# Altium PCB PCB1.PcbDoc
Units mm, origin at the board's own origin, x right, y up, seen from the top; angles counter-clockwise.
Board outline 59.97 x 69.92 mm, 2 copper layers (Top Layer, Bottom Layer); 51 components, 40 nets, 194 pads, 27 vias.
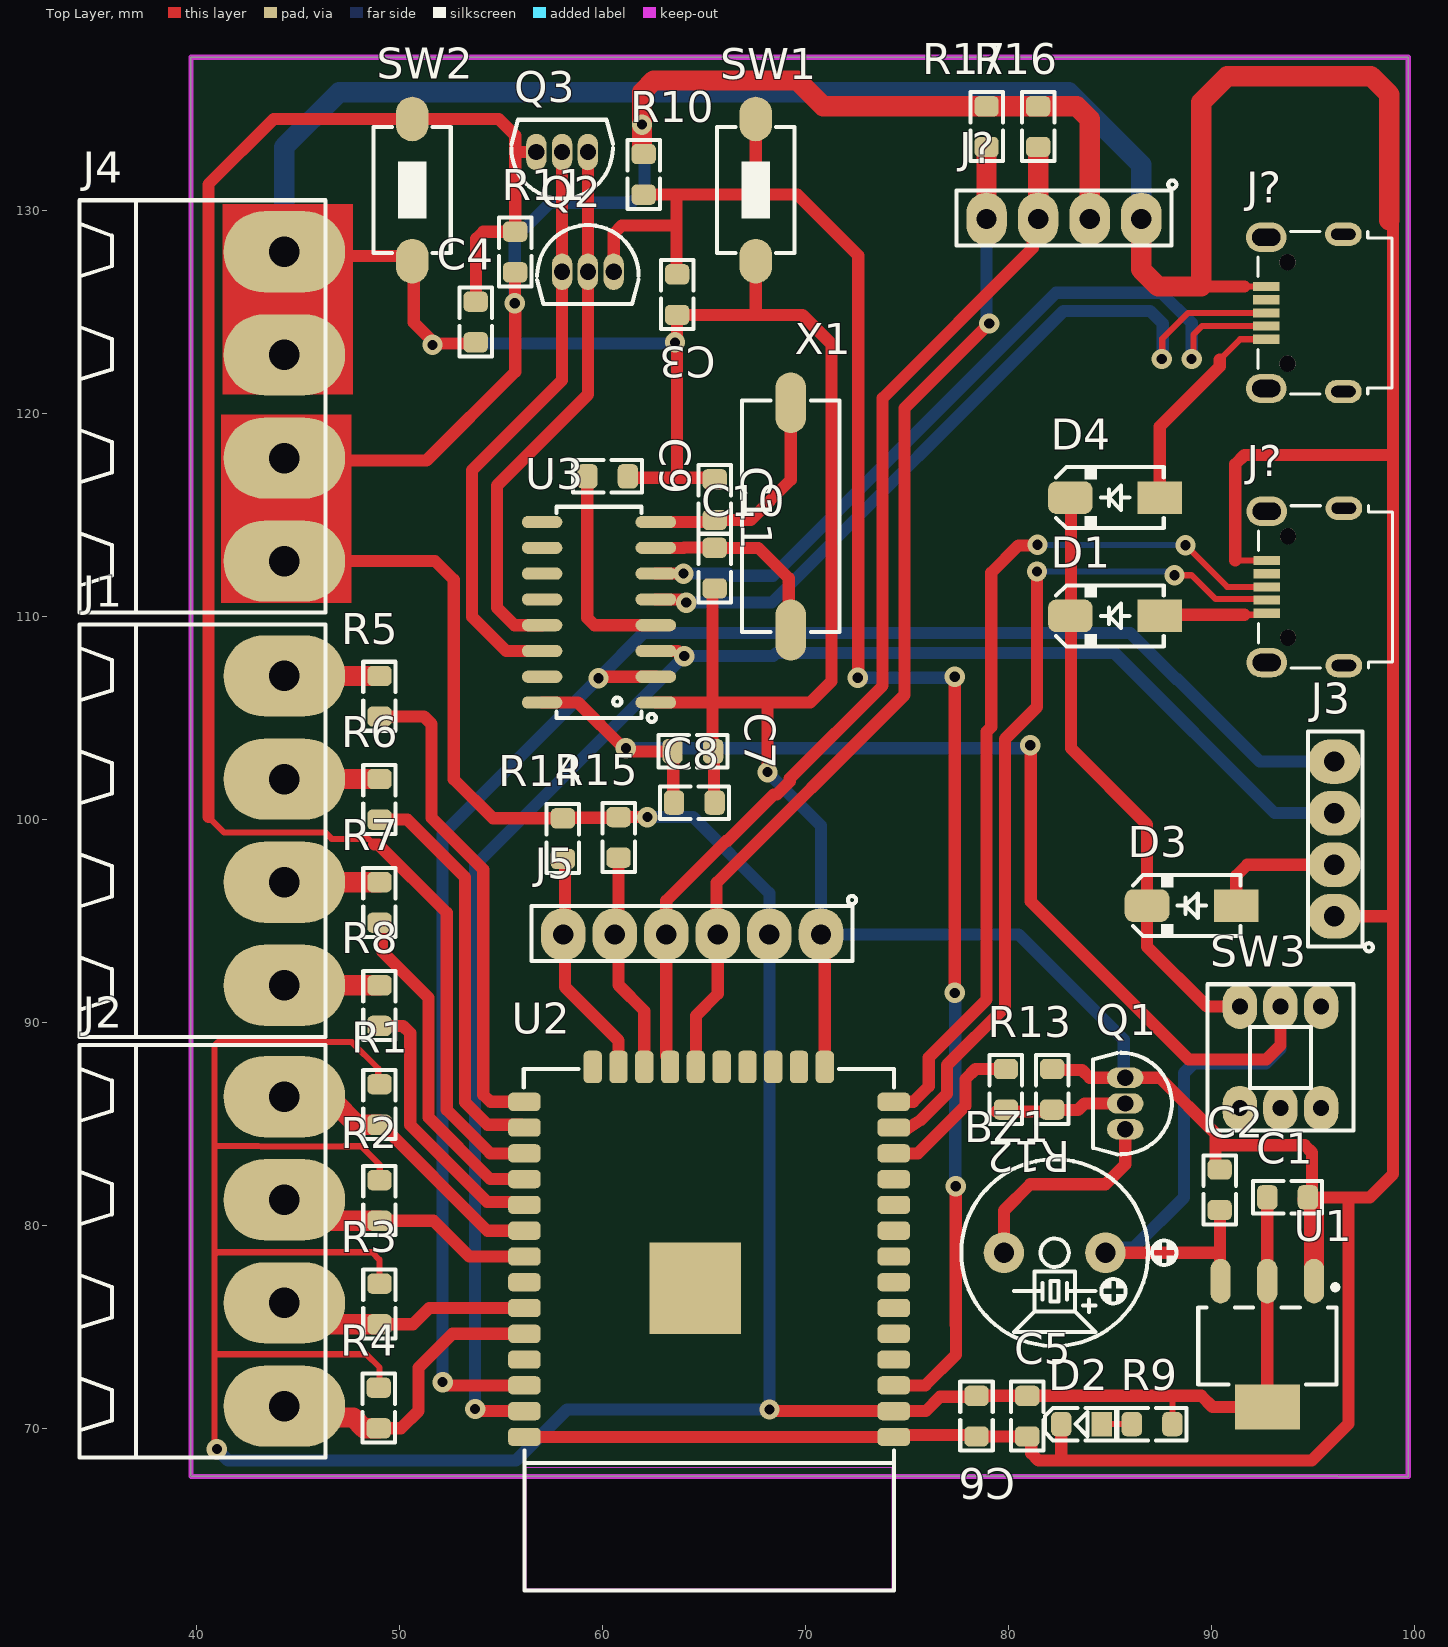
[diagram p0: Top Layer view]
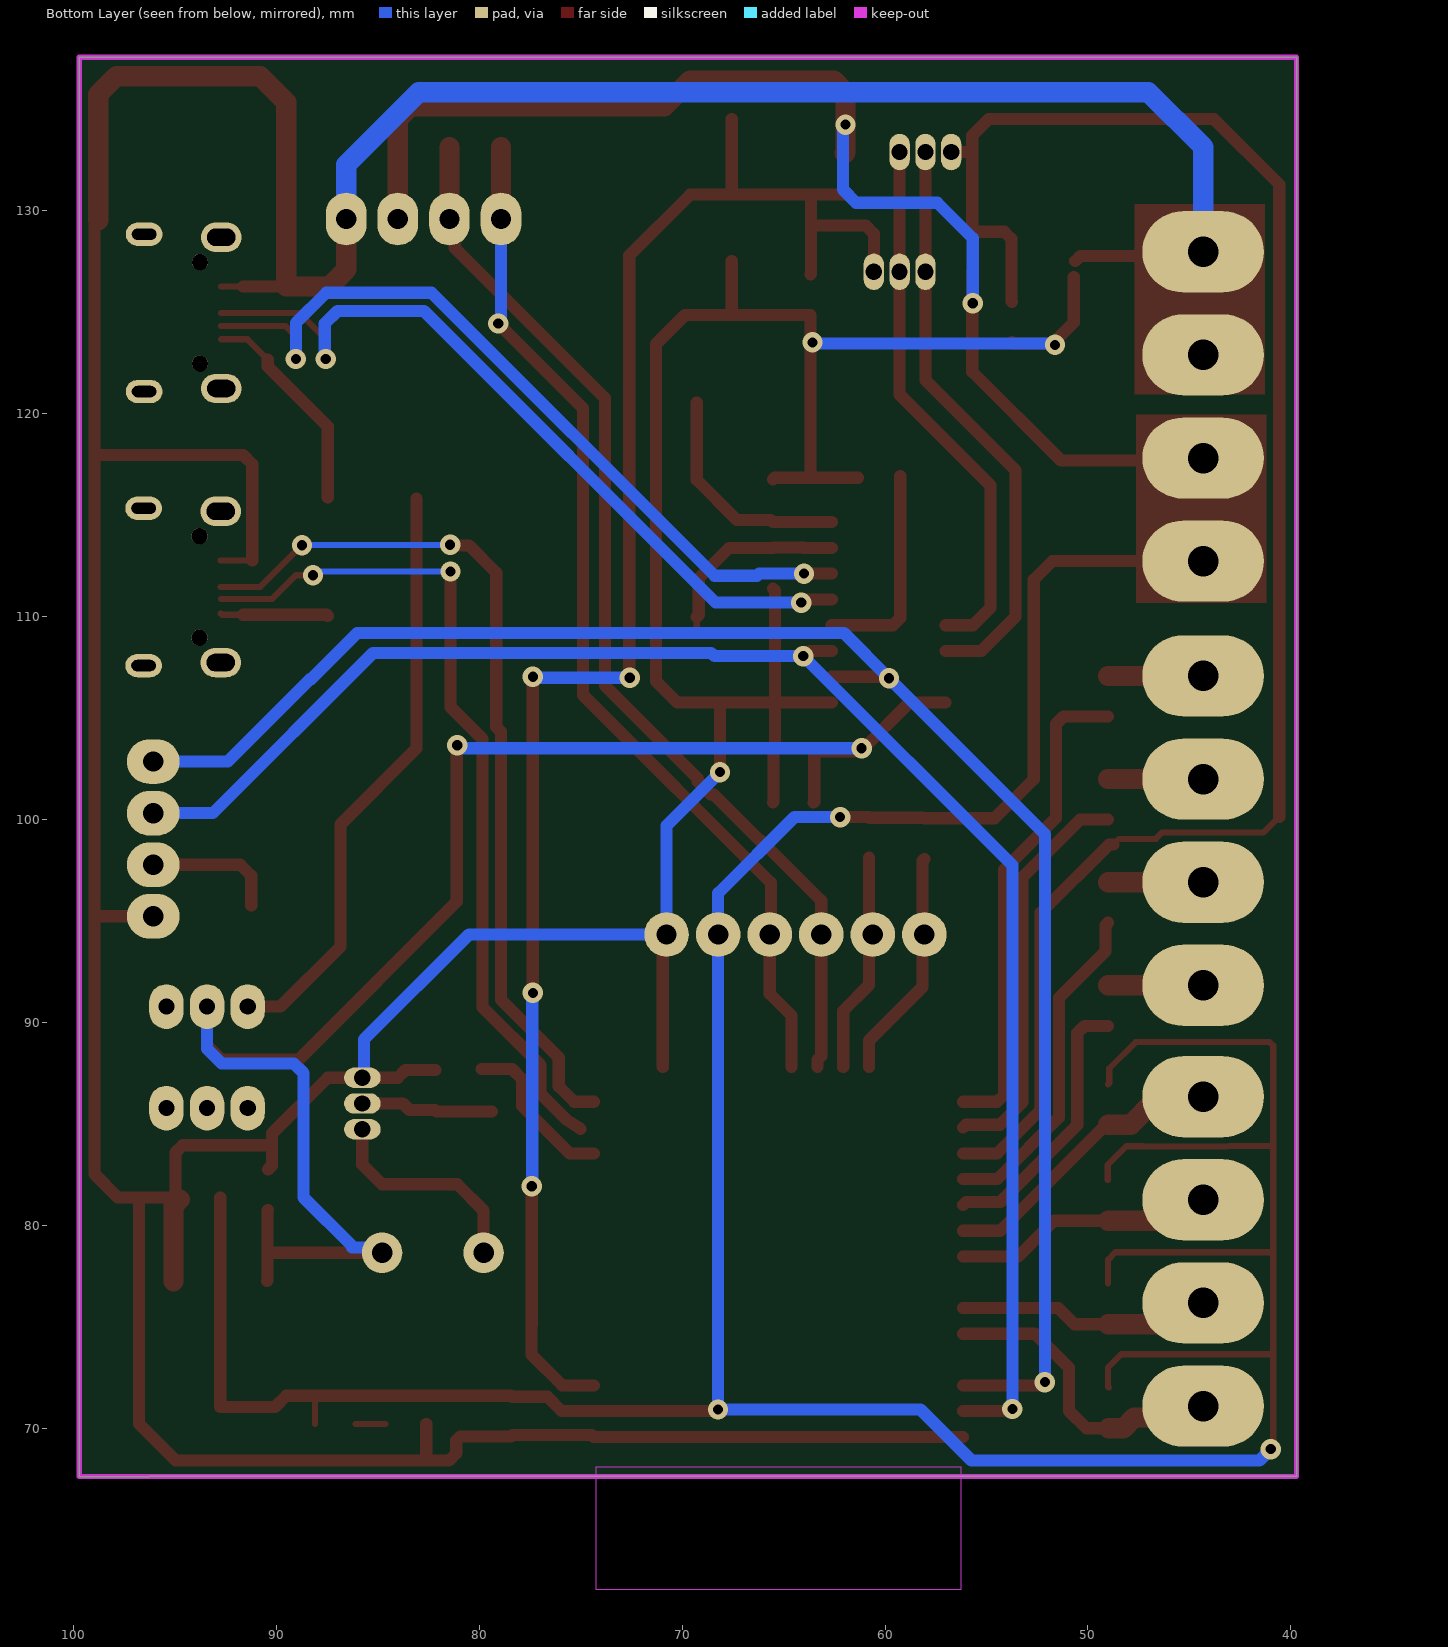
[diagram p1: Bottom Layer view, seen from below]

## Layer stack, top to bottom
Top Solder: solder mask 0.0102, Solder Resist, Dk 3.5
Top Layer: signal copper 0.0356
Dielectric 1: dielectric 0.32, FR-4, Dk 4.8
Bottom Layer: signal copper 0.0356
Bottom Solder: solder mask 0.0102, Solder Resist, Dk 3.5

## Board outline
39.725,67.634 96.244,67.625 96.245,67.625 99.692,67.625 99.692,137.541 39.725,137.541

## Design rules (kind name [scope] priority, off if disabled: settings)
Clearance [All] p1: gap=0.3 ignorepadtopadclearanceinfootprint=FALSE except(0.2: Arc-SMDPad Arc-THPad Track-SMDPad Track-THPad SMDPad-SMDPad SMDPad-THPad THPad-THPad)
PolygonConnect [All] p1: connectstyle=Relief reliefconductorwidth=0.254 reliefentries=4 polygonreliefangle="90 Angle" airgapwidth=0.254
RoutingVias [All] p1: holewidth=0.5 width=1 viastyle="Through Hole" minholewidth=0.5 minwidth=1 maxholewidth=0.6 maxwidth=1.2
SolderMaskExpansion [All] p1: expansion=0.102 istentingtop=FALSE
SupplyNets "Schematic Supply Nets_3" [InNet('+5')] p1: voltage=0.000
SupplyNets "Schematic Supply Nets_2" [InNet('VCC')] p2: voltage=0.000
SupplyNets "Schematic Supply Nets_1" [InNet('GND')] p3: voltage=0.000
SupplyNets "Schematic Supply Nets" [InNet('+3.3')] p4: voltage=0.000
Width [All] p1: maxlimit=1 minlimit=0.3 preferedwidth=0.6
30 further rules are at their usual default settings.

## Components (designator, comment, footprint, x,y, rotation, side; value= is the part's Value field where it differs from the comment)
BZ1 "BUZZER" BZ_C9 82.275,78.65 r180 top
C1 "20uF" C0805 93.75,81.375 r0 top
C2 "10uF" C0805 90.4,81.75 r90 top
C3 "100nF" C0805 63.675,125.85 r90 top
C4 "100nF" C0805 53.75,124.5 r90 top
C5 "10uF" C0805 80.925,70.6 r90 top
C6 "100nF" C0805 78.425,70.6 r270 top
C7 "10uF" C0805 64.45,103.35 r0 top
C8 "100nF" C0805 64.525,100.825 r0 top
C9 "100nF" C0805 60.25,116.9 r0 top
C10 "22pF" C0805 65.525,112.375 r270 top
C11 "22pF" C0805 65.525,115.75 r90 top
D1 "1N5822" D_SMA 85.25,110.025 r180 top
D2 "LED0805" LED0805 83.6,70.208 r180 top
D3 "1N5822" D_SMA 89.025,95.75 r180 top
D4 "1N5822" D_SMA 85.25,115.85 r180 top
J1 "CONN_TB4" MSTB_4#1 44.325,99.445 r90 top
J2 "CONN_TB4" MSTB_4#2 44.325,78.715 r90 top
J3 "HDRF4" HDR_F_1X4#1 96.05,99.035 r90 top
J4 "CONN_TB4" MSTB_4#1 44.325,120.34 r90 top
J5 "HDRF6" HDR_F_1X6 64.41,94.325 r180 top
J? "629105150521" 629105150521 95.625,111.45 r90 top
J? "629105150521" 629105150521 95.6,124.95 r90 top
J? "HDRF4" HDR_F_1X4#2 82.73,129.575 r180 top
Q1 "C945" TO92_3 85.75,86 r270 top
Q2 "C945" TO92_3 59.28,126.975 r0 top
Q3 "BC557" TO92_3 58.01,132.875 r180 top
R1 "1K" R0805 49.012,85.95 r90 top
R2 "1K" R0805 49.012,81.225 r90 top
R3 "1K" R0805 49.012,76.125 r90 top
R4 "1K" R0805 48.975,71 r90 top
R5 "1K" R0805 49.012,106.065 r270 top
R6 "1K" R0805 49.012,100.985 r270 top
R7 "1K" R0805 49.012,95.905 r270 top
R8 "1K" R0805 49.012,90.825 r270 top
R9 "1K" R0805 87.075,70.208 r0 top
R10 "1K" R0805 62.025,131.775 r90 top
R11 "1K" R0805 55.7,127.95 r270 top
R12 "1K" R0805 79.875,86.7 r90 top
R13 "1K" R0805 82.15,86.7 r270 top
R14 "1K" R0805 58.05,99.05 r90 top
R15 "1K" R0805 60.79,99.11 r90 top
R16 "1K" R0805 81.46,134.125 r90 top
R17 "1K" R0805 78.92,134.125 r90 top
SW1 "PUSHBUTTON" SWPBS_SPST_6X3X5 67.55,131 r90 top
SW2 "PUSHBUTTON" SWPBS_SPST_6X3X5 50.625,131 r90 top
SW3 "swPUSH" SWPUST_DPDT_S_7X7 93.4,88.275 r270 top
U1 "LD1117" SOT223_4 92.75,74.05 r270 top
U2 "ESP-32S" ESP32S 65.25,78.7 r180 top
U3 "CH340G" SO_16 59.825,110.2 r180 top
X1 "XTL_12MHz" XTL_2_11X5 69.275,114.925 r90 top

## Footprints (in the part's own frame and the unit in brackets; to place one, negate y for a bottom-side part, rotate by r counter-clockwise, add the part's x,y. Pads: shape width x height; smd on the part's side, far side on the other; paste and mask are expansions set on the pad)
629105150521 [mm] "Micro USB 2.0 SMT Type B Horizontal 5 Contacts High Current"
  rect 0.45x1.3 smd: 1(-1.3,2.9) 2(-0.65,2.9) 3(0,2.9) 4(0.65,2.9) 5(1.3,2.9)
  round 0.8 hole 0.8 unplated: MH1(-2.5,1.85) MH2(2.5,1.85)
  oval 1.15x1.8 hole 0.55 slot 1.2 at 90 deg: Shell(-3.875,-0.9) Shell(3.875,-0.9)
  oval 1.45x2 hole 0.85 slot 1.4 at 90 deg: Shell(-3.725,2.9) Shell(3.725,2.9)
  silkscreen extent -4,-3.3 4,3.3, body extent -4,-3.3 4,3.3, height 2.75
BZ_C9 [mm] "BUZZER 9mm DIA, 7.62mm pitch"
  round 2 hole 1: 1(-2.5,0) 2(2.5,0)
  silkscreen extent -6,-4.6 4.6,4.6, body extent -4.55,-4.55 4.55,4.55, height 5.6
C0805 [mm] "CHIP Capacitor, 2.0X1.3mm, 0805"
  rrect50% 1x1.2 smd paste-0.1 mask+0.075: 1(-1,0) 2(1,0)
  Top Layer pour cut-out: -0.5,0.8 0.5,0.8 0.5,-0.8 -0.5,-0.8
  silkscreen extent -1.7,-0.8 1.7,0.8, body extent -1,-0.62 1,0.63, height 1
D_SMA [mm] "SMA Molded Diode, 2-Leads, Body 4.3x2.7mm, SOD-128"
  rect 2.2x1.6 smd paste-0.1: 1(-2.2,0)
  rrect50% 2.2x1.6 smd paste-0.1: 2(2.2,0)
  silkscreen extent -2.4,-1.5 2.9,1.5, body extent -2.75,-1.4 2.75,1.4, height 2.6
ESP32S [mm] "ESP-32S, ESP32­WROOM­32E"
  rrect50% 1.6x0.9 smd mask+0.075: 1(-9.1,9.125) 2(-9.1,7.855) 3(-9.1,6.585) 4(-9.1,5.315) 5(-9.1,4.045) 6(-9.1,2.775) 7(-9.1,1.505) 8(-9.1,0.235) 9(-9.1,-1.035) 10(-9.1,-2.305) 11(-9.1,-3.575) 12(-9.1,-4.845) 13(-9.1,-6.115) 14(-9.1,-7.385) 25(9.1,-7.385) 26(9.1,-6.115) 27(9.1,-4.845) 28(9.1,-3.575) 29(9.1,-2.305) 30(9.1,-1.035) 31(9.1,0.235) 32(9.1,1.505) 33(9.1,2.775) 34(9.1,4.045) 35(9.1,5.315) 36(9.1,6.585) 37(9.1,7.855) 38(9.1,9.125)
  rrect50% 0.9x1.6 smd mask+0.075: 15(-5.7,-9.1) 16(-4.43,-9.1) 17(-3.16,-9.1) 18(-1.89,-9.1) 19(-0.62,-9.1) 20(0.65,-9.1) 21(1.92,-9.1) 22(3.19,-9.1) 23(4.46,-9.1) 24(5.73,-9.1)
  rect 4.5x4.5 smd: GND(0.68,1.795)
  Top Layer pour cut-out: -9.1,16.7 9.1,16.7 9.1,10.4 -9.1,10.4
  Keep-Out Layer region: 9,10.625 -9,10.625 -9,16.625 9,16.625
  Keep-Out Layer region: 9,10.625 -9,10.625 -9,16.625 9,16.625
  silkscreen extent -9.1,-9 9.13,16.7, body extent -9.04,-8.93 9.04,16.61, height 3
HDR_F_1X4#1 [mm] "HEADER FEMALE pitch: 2.54mm"
  oval 2.2x2.6 hole 1 mask+0.1: 1(-3.81,0) 2(-1.27,0) 3(1.27,0) 4(3.81,0)
  silkscreen extent -5.54,-1.9 5.3,1.3, body extent -5.2,-1.3 5.21,1.2, height 8.5
HDR_F_1X4#2 [mm] "HEADER FEMALE pitch: 2.54mm"
  oval 2x2.6 hole 1 mask+0.1: 1(-3.81,0) 2(-1.27,0) 3(1.27,0) 4(3.81,0)
  silkscreen extent -5.54,-1.9 5.3,1.3, body extent -5.2,-1.3 5.21,1.2, height 8.5
HDR_F_1X6 [mm] "HEADER FEMALE pitch: 2.54mm"
  oval 2.2x2.6 / inner oval 2.2x2.6 / far side round 2.2 hole 1 mask+0.1: 1(-6.35,0) 2(-3.81,0) 3(-1.27,0) 4(1.27,0) 5(3.81,0) 6(6.35,0)
  silkscreen extent -8.08,-1.9 7.9,1.3, body extent -7.74,-1.3 7.75,1.2, height 8.5
LED0805 [mm] "LED SMD 0805"
  rect 1x1.2 smd paste-2 mask+0.075: 1(-1,0)
  rrect50% 1x1.2 smd paste-2 mask+0.075: 2(1,0)
  Top Layer pour cut-out: -0.5,0.8 0.5,0.8 0.5,-0.8 -0.5,-0.8
  silkscreen extent -1.7,-0.8 1.8,0.8, body extent -1.01,-0.62 1.01,0.63, height 1.1
MSTB_4#1 [mm] "PHOENIX MSTB 2, 5-G, 5.08mm pitch"
  oval 4x6 hole 1.5: 1(-7.62,0) 2(-2.54,0) 3(2.54,0) 4(7.62,0)
  silkscreen extent -10.16,-2.03 10.16,10.1, body extent -10,-2 10,10, height 8.6
MSTB_4#2 [mm] "PHOENIX MSTB 2, 5-G, 5.08mm pitch"
  oval 4x6 hole 1.5: 1(-7.62,0) 2(-2.54,0) 3(2.54,0) 4(7.62,0)
  silkscreen extent -10.16,-2.03 10.16,10.1, body extent -10,-2 10,10, height 8.6
R0805 [mm] "CHIP RESISTOR 1/8 WATT ,2.0X1.3mm, 0805, 2012"
  rrect50% 1x1.2 smd paste-0.1 mask+0.075: 1(-1,0) 2(1,0)
  Top Layer pour cut-out: -0.5,0.8 0.5,0.8 0.5,-0.8 -0.5,-0.8
  silkscreen extent -1.7,-0.8 1.7,0.8, body extent -1.15,-0.67 1.15,0.67, height 0.76
SO_16 [mm] "SOP, SOIC, 3.9mm width, 1.27mm pitch,"
  oval 2x0.6 smd: 1(-2.8,4.445) 2(-2.8,3.175) 3(-2.8,1.905) 4(-2.8,0.635) 5(-2.8,-0.635) 6(-2.8,-1.905) 7(-2.8,-3.175) 8(-2.8,-4.445) 9(2.8,-4.445) 10(2.8,-3.175) 11(2.8,-1.905) 12(2.8,-0.635) 13(2.8,0.635) 14(2.8,1.905) 15(2.8,3.175) 16(2.8,4.445)
  silkscreen extent -2.8,-5.2 2.1,5.4, body extent -3.1,-4.95 3.1,4.95, height 1.7
SOT223_4 [mm] "SOT223, 4-Leads, Body 6.5x3.5mm, Pitch 2.30mm"
  oval 2.2x1 smd: 1(-3.2,2.3) 2(-3.2,0) 3(-3.2,-2.3)
  rect 2.2x3.2 smd paste-5: 4(3,0)
  Top Layer pour cut-out: -1.7,3.556 1.7,3.556 1.7,-3.556 -1.7,-3.556
  silkscreen extent -3.02,-3.4 1.9,3.48, body extent -3.5,-3.25 3.5,3.25, height 1.7
SWPBS_SPST_6X3X5 [mm] "SWITCH, PUSHBUTTON, SMD, SPST, 6X3.5mm, SKQMBBE010, 50000 Cycles, 1.57N Force"
  oval 2.2x1.6 smd mask+0.1: 1(-3.5,0) 2(3.5,0)
  silkscreen extent -3.1,-1.9 3.1,1.9, body extent -3.65,-1.75 3.65,1.75, height 5
SWPUST_DPDT_S_7X7 [mm] "KFC 7x7, 2mm pitch"
  oval 2.2x1.7 hole 0.8: 1(-2.5,2) 2(-2.5,0) 3(-2.5,-2) 4(2.5,-2) 5(2.5,0) 6(2.5,2)
  silkscreen extent -3.6,-3.6 3.6,3.6, body extent -3.5,-3.5 3.5,3.5, height 14.2
TO92_3 [mm] "TO-92, SOT54"
  oval 1x1.8 hole 0.8 mask+0.1: 1(-1.27,0) 2(0,0) 3(1.27,0)
  silkscreen extent -2.5,-1.59 2.5,2.3, body extent -2.38,-1.45 2.38,2.18, height 7.82
XTL_2_11X5 [mm] "SMD crystal resonator, ABL, ABLS, HC-49, HC49 11X4.5MM"
  oval 3x1.5 smd: 1(-5.6,0) 2(5.6,0)
  silkscreen extent -5.7,-2.4 5.7,2.4, body extent -6.4,-2.41 6.4,2.41, height 4.3

## Part data
BZ1: library part BUZZER_C9, "Buzzer, 9mm, Magnetic Transducer", MANF=Mallory, MANF_P#=PB-09N23P-03Q, PARAM=2.7KHz, PARAM2="3V, 30mA", PRICE=$3
C1 C2 C3 C4 C5 C6 C7 C8 C9 C10 C11: library part CAP_SMD_MLCC_0805, "CAP, MLCC", ASSEMBLY=ASSEMBLY, MANF=-, MANF_P#=MANF_PART#, PARAM="-, -%", PARAM2=-V, PRICE="100= 1$"
D1 D3 D4: library part DIODE_SMD_SCHOTTKY_1N5822, "DIODE, SCHOTTKY, 40V, 3A", ASSEMBLY=ASSEMBLY, DESC=DESCRIPTION, MANF=DIODES, MANF_P#=1N5822, PARAM=40V, PARAM2=3A, PRICE=PRICE
D2: library part LED_SMD_0805, "LED, SMD, 0805", ASSEMBLY=ASSEMBLY, DESC=DESCRIPTION, MANF=MANF, MANF_P#=MANF_PART#, PARAM2=2.2V, PRICE=PRICE
J1 J2 J4: library part CONN_MSTB_4, "CONN, PHOENIX MSTB, 5-G, 5.08mm pitch", PARAM=12A, PARAM2=320V
J3 J?: library part HDR_F_1X4, "CONN, HEADER, Female, pitch: 2.54mm, 4POS"
J5: library part HDR_F_1X6, "CONN, HEADER, Female, pitch: 2.54mm, 6POS"
J? J?: "WR-COM Micro USB 2.0 SMT Type B Horizontal 5 Contacts High Current", Manufacturer="Wurth Elektronik", Operating Temperature Max=85°C, Operating Temperature Min=-40°C, Rated Current=3A, Working Voltage="30V (AC)", Application="Micro USB 2.0", Category="Input/Output Connectors", ComponentLink1Description="Website Link", ComponentLink1URL=https://www.we-online.com/redexpert/article/629105150521?ad, ComponentLink2Description="Datasheet Link", ComponentLink2URL=https://www.we-online.com/redexpert/spec/629105150521?ad, Gender=Receptacle, Interface Type="Type B", Manufacturer Part Number=629105150521, Match Code=WR-USB, Mount="Surface Mount", Number of Pins=5, Number of Ports=1, Orientation=Horizontal, Packaging="Tape and Reel"
Q1 Q2: library part NPN_C945_TO92, "BJT, NPN, 50v, 0.15A, THD, TO92, BC945", MANF=-, MANF_P#=C945, PARAM="50v, 0.15A", PARAM2=250mW
Q3: library part PNP_BC557_TO92, "BJT, PNP, 45v, 0.1A, THD, TO92", MANF=MULTICOMP, MANF_P#=BC557, PARAM="45v, 0.1A", PARAM2=500mW
R1 R2 R3 R4 R5 R6 R7 R8 R9 R10 R11 R12 R13 R14 R15 R16 R17: library part RES_SMD, "RESISTOR, SMD", ASSEMBLY=ASSEMBLY, DESC=DESCRIPTION, DIST#=MOUSER, MANF=-, MANF_P#=-, PARAM=-W, PARAM2=1%, PRICE="100= 0.5$"
SW1 SW2: library part SWPBS_SPST_6X3_222BMVBAR, "SWITCH, PUSH BUTTON, TACTILE, SMD, SPST, 6X3.5X5mm", ASSEMBLY=ASSEMBLY, DESC=DESCRIPTION, MANF=CTS, MANF_P#=222BMVBAR, PARAM=PARAM, PRICE=PRICE
SW3: library part SWPUSH_DPDT_6_7X7, "SWITCH, PUSH, DPDT, THD, ON/OFF", ASSEMBLY=ASSEMBLY, DESC=DESCRIPTION, MANF="e-switch, china", MANF_PART#="TL 2230, KFC-7X7", PARAM="20VAC, 0.4VA", PRICE=0.6t@Javan
U1: library part VREG_1117_SOT223, "REG, Linear, LDO1V, 0.8A, SOT-223", MANF="TI, ON, ST", MANF_P#="LD1117, LM1117, AMS1117, TLV1117, REG1117, NCP1117, LT1117, SPX1117", PARAM="LDO1V, 0.8A", PARAM2=1.2/1.5/1.8/2.5/2.85/3.3/5V
U2: "WiFi with Bluetooth 4.0", MANF_P#=ESP-32S
U3: library part CH340G_SOP16, "USB-UART", PACKAGE=SOP-16, MANF_P#=CH340G
X1: library part XTL_2_HC49_SMD, "Crystal MOST POPULAR ABL HC49 PACKAGE"

## Via types
v1: diameter 1, hole 0.5, Top Layer to Bottom Layer, 27 vias

## Nets (pads, with @x,y where several pads share a name; then routed paths per layer and width w, separated by ;. In a path a pad name is that pad's centre, name@x,y a point inside that pad or via, vN(x,y) a via of type N, cw(c..) or ccw(c..) an arc to the next point about the centre after c; other vN are vias at no path point)
32k: J5.6 R14.1 U2.23 | length 11.4
  Top Layer w0.6: R14.1@58.06,98.04 58.15,97.95 58.15,94.325 58.15,91.741 60.79,89.101 U2.23
+3.3: C1.1 C5.2 C6.1 J4.1 J4.2 J5.2 J?.2@84,129.575 R1.2 R2.2 R3.2 R4.2 R9.2 R10.2 R11.2 R14.2 R15.2 R16.2 R17.2 U1.2 U1.4 U2.2 | length 252.6
  Top Layer w0.3: v1@40.875,69.15 40.875,73.65 ; R4.2 49.013,72.038 49.013,73 48.363,73.65 40.875,73.65 ; R3.2 49.012,78.313 48.65,78.675 41.025,78.675 40.875,78.525 ; R2.2 49.025,82.238 49.025,82.981 48.112,83.894 47.275,83.894 45.336,83.885 cw(c45.325,86.335) 45.325,83.885 43.325,83.885 cw(c43.325,86.335) 43.054,83.9 40.875,83.9 ; R1.2 48.951,87.011 48.951,87.724 47.65,89.025 41.051,89.025 40.875,88.849 40.875,83.9 ; R9.2 88.075,71.6 ; 40.875,73.65 40.875,78.525 ; 40.875,78.525 40.875,78.675 40.875,83.9
  Top Layer w0.6: R11.2 55.688,126.938 55.688,125.438 v1(55.675,125.425) 55.7,125.4 55.7,122.05 51.33,117.68 44.325,117.68 J4.1 51.755,112.72 52.675,111.8 52.675,101.975 54.6,100.05 R14.2 ; R14.2@58.145,100.08 60.76,100.08 R15.2 v1(62.209,100.11) ; R10.2@61.988,132.813 R10.2 ; v1(68.225,70.925) 68.279,70.925 68.359,70.845 75.92,70.845 76.625,71.55 78.375,71.55 C6.1 C5.2 88.075,71.6 89.5,71.6 90.05,71.05 U1.4 U1.2 C1.1
  Top Layer w1: R10.2@61.988,132.813 61.95,132.85 v1(61.95,134.225) 61.95,135.824 62.526,136.4 69.6,136.4 70.875,135.125 R17.2 R16.2 83.374,135.125 84,134.499 J?.2@84,129.575
  Bottom Layer w0.6: v1@40.855,68.859 41.111,68.859 41.551,68.418 55.744,68.418 58.251,70.925 v1(68.225,70.925) 68.22,70.93 J5.2 68.22,96.355 64.465,100.11 v1(62.209,100.11) ; v1(55.675,125.425) 55.675,128.625 57.425,130.375 61.425,130.375 62.075,131.025 62.075,134.1 v1(61.95,134.225)
  other v1: 41,68.975
+5: BZ1.1 C2.1 C7.1 C8.1 SW3.2 U1.3 U3.16 | length 83.2
  Top Layer w0.3: v1@61.1,103.45 v1(61.15,103.5)
  Top Layer w0.6: U3.16 58.795,105.755 61.1,103.45 61.2,103.35 C7.1 63.488,103.313 63.488,100.862 C8.1 ; v1(81.075,103.65) 81.1,103.625 81.1,95.95 88.875,88.175 92.7,88.175 93.4,88.875 SW3.2 ; BZ1.1 90.3,78.65 90.425,78.775 ; C2.1 90.425,80.725 90.425,78.775 ; U1.3 90.425,77.275 90.425,78.775
  Bottom Layer w0.6: v1(61.15,103.5) 80.871,103.5 81.021,103.65 v1(81.075,103.65) ; BZ1.1 85.025,78.9 86.25,78.9 86.25,78.975 88.65,81.375 88.65,87.5 89.125,87.975 92.675,87.975 93.4,88.7 SW3.2
buzzer: R12.2 U2.12 | length 8
  Top Layer w0.6: U2.12 75.541,83.545 77.875,85.879 77.875,87.2 78.375,87.7 R12.2
D+: J?.3@92.725,111.45 U2.14 | length 43.6
  Top Layer w0.3: v1(88.725,113.5) 90.775,111.45 J?.3@92.725,111.45
  Top Layer w0.6: U2.14 75.31,86.085 76.075,86.85 76.075,88.269 78.925,91.119 78.925,104.328 79.15,104.553 79.15,112.15 80.487,113.487 81.387,113.487 v1(81.425,113.525)
  Bottom Layer w0.3: v1(81.425,113.525) 81.438,113.512 88.712,113.512 v1(88.725,113.5)
D-: J?.2@92.725,110.8 U2.13 | length 42.1
  Top Layer w0.3: v1(88.175,112.025) 89.026,112.025 90.201,110.85 J?.2@92.715,110.85
  Top Layer w0.6: U2.13@75.002,84.75 75.683,85.185 76.975,86.477 76.975,87.897 79.825,90.747 79.825,103.956 81.407,105.537 v1(81.407,112.207)
  Bottom Layer w0.3: v1(81.407,112.207) 87.858,112.207 88.04,112.025 v1(88.175,112.025)
DU+: J?.3@92.7,124.95 U3.5 | length 39.6
  Top Layer w0.3: v1@87.55,122.725 87.575,122.75 87.575,123.675 88.85,124.95 J?.3@92.7,124.95
  Top Layer w0.6: U3.5 63.857,110.835 64.017,110.675 v1(64.125,110.675)
  Bottom Layer w0.6: v1(64.125,110.675) 68.341,110.675 82.711,125.046 86.979,125.046 87.599,124.425 87.599,122.774 v1@87.55,122.725
  other v1: 87.55,122.675
DU-: J?.2@92.7,124.3 U3.6 | length 39.6
  Top Layer w0.3: v1(89.025,122.675) 89.106,122.756 89.106,123.881 89.525,124.3 J?.2@92.7,124.3
  Top Layer w0.6: U3.6 v1(63.991,112.105)
  Bottom Layer w0.6: v1(63.991,112.105) 66.194,112.105 66.299,112 68.393,112 82.339,125.946 87.529,125.946 89.025,124.45 v1(89.025,122.675)
GND: C1.2 C2.2 C3.1 C4.1 C5.1 C6.2 C7.2 C8.2 C9.2 C10.2 C11.2 D2.2 J3.1 J4.3 J4.4 J5.1 J?.1@86.54,129.575 J?.5 Q1.1 R13.1 SW1.1 SW2.1 U1.1 U2.1 U2.15 U2.38 U3.1 | length 360.8
  Top Layer w0.3: C9.2 C9.2@61.325,116.825 ; 91.175,112.75 J?.5@92.725,112.75 ; 91.65,126.25 J?.5@92.7,126.25
  Top Layer w0.6: J4.3 J4.4 ; J4.4@44.415,127.75 50.375,127.75 SW2.1 ; SW2.1@50.7,126.725 50.7,124.481 v1@51.625,123.556 ; v1(51.625,123.375) 51.687,123.437 53.688,123.437 C4.1 ; U2.38 U2.1 74.45,69.675 78.35,69.675 C6.2 C5.1@80.891,69.6 ; C9.2@61.325,116.825 63.675,116.825 ; U3.1 65.425,105.755 ; C8.2 65.488,100.862 65.488,103.313 C7.2 65.425,103.375 65.425,105.755 ; C10.2 65.425,111.275 65.425,105.755 ; C11.2 65.45,116.825 63.675,116.825 ; SW1.1 67.55,124.85 ; v1(68.125,102.325) 68.125,105.755 ; J5.1 70.95,94.135 U2.15 ; C5.1 81.121,69.404 81.121,68.769 81.472,68.418 82.55,68.418 ; R13.1@82.15,87.65 83.625,87.65 84.005,87.27 Q1.1 87.455,87.27 90.2,84.525 90.2,82.95 C2.2 ; D2.2 82.6,68.468 82.55,68.418 ; 89.498,126.25 91.622,126.25 ; 90.4,83.94 94.599,83.94 94.95,83.589 94.95,82.026 94.95,81.575 C1.2 ; 91.175,112.75 91.175,117.499 91.626,117.95 97.939,117.95 98.95,117.95 ; C1.2@94.75,81.275 94.85,81.375 96.75,81.375 ; J3.1 98.725,95.225 98.95,95.45 ; 98.765,129.501 98.95,129.316 98.95,117.95 ; 63.675,116.825 63.675,123.5 C3.1 67.55,124.85 ; 65.425,105.755 68.125,105.755 ; 67.55,124.85 69.85,124.85 71.282,123.418 71.282,106.807 70.23,105.755 68.125,105.755 ; 82.55,68.418 94.943,68.418 96.75,70.225 96.75,81.375 ; 96.75,81.375 97.8,81.375 98.95,82.525 98.95,95.45 ; 98.95,95.45 98.95,117.95
  Top Layer w1: J?.1@86.54,129.575 86.54,127.085 87.375,126.25 89.498,126.25 89.498,135.337 90.775,136.614 97.861,136.614 98.765,135.71 98.765,129.501 ; C1.2@94.75,81.275 95.05,80.975 U1.1
  Bottom Layer w0.6: v1(51.625,123.375) 51.687,123.438 63.513,123.438 v1(63.575,123.5) ; v1(68.125,102.325) 70.76,99.69 J5.1 80.5,94.325 85.675,89.15 85.675,87.345 Q1.1 ; J3.1 J3.1@96.45,95.225
  Bottom Layer w1: J4.4 44.325,133.125 47.025,135.825 82.975,135.825 86.54,132.26 J?.1@86.54,129.575
key1: J2.4 R1.1 U2.30 | length 14.6
  Top Layer w0.3: J2.4 44.51,86.15 J2.4@46.7,86.15
  Top Layer w0.6: R1.1 49.112,84.95 54.327,79.735 U2.30
  Top Layer w1: J2.4@46.7,86.15 47.9,84.95 R1.1
key2: J2.3 R2.1 U2.31 | length 13
  Top Layer w0.6: J2.3 44.974,81.255 J2.3@46.004,80.225 ; R2.1 51.675,80.225 53.435,78.465 U2.31
  Top Layer w1: J2.3@46.004,80.225 R2.1
key3: J2.2 R3.1 U2.33 | length 12.6
  Top Layer w0.6: J2.2 44.974,76.175 J2.2@46.024,75.125 ; R3.1 50.669,75.125 51.469,75.925 U2.33
  Top Layer w1: J2.2@46.024,75.125 R3.1
key4: J2.1 R4.1 U2.34 | length 16.2
  Top Layer w0.6: J2.1 J2.1@44.974,71.095 ; R4.1 50.075,70 50.932,70.857 50.932,72.982 52.605,74.655 U2.34
  Top Layer w1: J2.1 45.373,71.307 46.146,70.534 47.714,70.534 48.249,70 R4.1
led1: R5.2 U2.25 | length 24.2
  Top Layer w0.6: R5.2 51.21,105.065 51.575,104.7 51.575,100.073 54.125,97.523 54.125,86.436 54.476,86.085 U2.25
led2: R6.2 U2.26 | length 19.9
  Top Layer w0.6: R6.2 50.39,99.985 53.225,97.15 53.225,86.064 54.336,84.952 56.013,84.952 U2.26
led3: R7.2 U2.28 | length 16.6
  Top Layer w0.6: R7.2 49.134,94.783 49.134,93.505 51.425,91.214 51.425,85.318 54.468,82.275 U2.28
led4: R8.2 U2.29 | length 13.4
  Top Layer w0.6: R8.2 50.174,89.825 50.525,89.474 50.525,84.945 54.316,81.154 56.001,81.154 U2.29
NetBZ1_2: BZ1.2 Q1.3 | length 10.7
  Top Layer w0.6: BZ1.2 79.775,80.725 81.075,82.025 84.775,82.025 85.75,83 Q1.3
NetC3_2: C3.2 Q2.3 R10.1 SW1.2 U2.3 | length 87.4
  Top Layer w0.6: Q2.3 60.55,128.85 60.95,129.25 63.65,129.25 ; R10.1 63.65,130.775 ; C3.2 63.65,126.875 63.65,129.25 ; SW1.2 67.55,130.825 67.5,130.775 ; v1(72.575,106.975) 72.6,107 72.6,127.775 69.6,130.775 67.5,130.775 ; U2.3 75.9,72.115 77.41,73.625 77.41,75.09 77.4,75.1 v1(77.4,81.925) ; v1(77.35,91.45) v1(77.35,107.025) ; 63.65,129.25 63.65,130.775 ; 63.65,130.775 67.5,130.775
  Bottom Layer w0.6: v1(72.575,106.975) 77.3,106.975 v1(77.35,107.025) ; v1(77.35,91.45) 77.375,91.425 77.375,81.95 v1(77.4,81.925)
NetC4_2: C4.2 Q3.3 R11.1 SW2.2 U2.27 | length 87
  Top Layer w0.3: 40.582,100.118 41.345,99.355 46.34,99.355 46.66,99.035 48.472,99.035 48.754,98.754
  Top Layer w0.6: 40.582,100.118 40.582,131.282 43.8,134.5 SW2.2 54.891,134.5 55.7,133.69 55.7,132.875 ; 48.754,98.754 48.966,98.754 52.325,95.394 52.325,85.691 54.471,83.545 U2.27 ; C4.2 53.775,125.525 53.775,128.599 54.126,128.95 R11.1 55.7,132.875 ; Q3.3 55.7,132.875
NetC9_1: C9.1 U3.4 | length 10.5
  Top Layer w0.6: C9.1 59.25,109.915 59.6,109.565 U3.4
NetC10_1: C10.1 U3.7 X1.1 | length 9.8
  Top Layer w0.3: X1.1 X1.1@69.275,109.975
  Top Layer w0.6: U3.7 64,113.375 64.025,113.4 C10.1@65.525,113.4 ; C10.1 67.675,113.375 69.175,111.875 69.175,110.075 X1.1@69.275,109.975
NetC11_1: C11.1 U3.8 X1.2 | length 11.3
  Top Layer w0.6: U3.8 65.525,114.645 65.63,114.75 67.3,114.75 69.275,116.725 X1.2
NetD1_1: D1.1 J?.1@92.725,110.15 | length 5.3
  Top Layer w0.3: 91.625,110.079 92.654,110.079 J?.1@92.725,110.15
  Top Layer w0.6: D1.1 87.504,110.079 91.625,110.079
NetD2_1: D2.1 R9.1 | length 1.5
  Top Layer w0.3: D2.1 R9.1
NetD3_1: D3.1 J3.2 | length 6.5
  Top Layer w0.6: D3.1 91.225,97.225 91.765,97.765 J3.2
NetD4_1: D4.1 J?.1@92.7,123.65 | length 10.7
  Top Layer w0.3: 90.407,122.643 91.414,123.65 J?.1@92.7,123.65
  Top Layer w0.6: D4.1 87.45,119.35 90.407,122.307 90.407,122.643
NetJ1_1: J1.1 R8.1 | length 4.7
  Top Layer w1: J1.1 R8.1
NetJ1_2: J1.2 R7.1 | length 4.7
  Top Layer w1: J1.2 R7.1
NetJ1_3: J1.3 R6.1 | length 4.7
  Top Layer w1: J1.3 R6.1
NetJ1_4: J1.4 R5.1 | length 4.7
  Top Layer w1: J1.4 R5.1
NetJ3_3: J3.3 U2.37 U3.3 | length 80.7
  Top Layer w0.6: v1(53.725,70.95) 53.779,70.95 53.884,70.845 U2.37 ; U3.3 63.719,108.295 63.974,108.04 v1(64.029,108.04)
  Bottom Layer w0.6: v1(53.725,70.95) 53.725,97.736 v1(64.029,108.04) 68.407,108.04 68.567,108.2 85.225,108.2 93.12,100.305 J3.3
NetJ3_4: J3.4 U2.36 U3.2 | length 84.6
  Top Layer w0.6: v1(52.125,72.275) 52.179,72.275 52.339,72.115 U2.36 ; v1(59.8,106.95) 59.854,106.95 59.929,107.025 U3.2
  Bottom Layer w0.6: v1(52.125,72.275) 52.125,99.275 v1(59.8,106.95) 62.025,109.175 86,109.175 88.275,106.9 88.325,106.9 92.38,102.845 J3.4
NetQ1_2: Q1.2 R12.1 R13.2 | length 6.5
  Top Layer w0.6: R12.1@79.377,85.6 82.1,85.6 82.175,85.675 83.425,85.675 83.75,86 Q1.2
NetQ2_1: Q2.1 Q3.2 U3.14 | length 28.9
  Top Layer w0.6: U3.14 55.255,108.295 53.575,109.975 53.575,117.2 58.01,121.635 Q2.1 Q3.2
NetQ2_2: Q2.2 Q3.1 U3.13 | length 26.9
  Top Layer w0.6: U3.13 55.66,109.565 54.8,110.425 54.8,116.45 59.28,120.93 Q2.2 Q3.1
scl: J5.4 J?.3@81.46,129.575 R16.1 U2.21 | length 53.1
  Top Layer w0.6: U2.21 63.33,88.15 63.14,88.34 J5.4 63.14,95.988 66.102,98.949 66.164,98.949 68.439,101.225 68.581,101.225 69.225,101.869 69.225,102.011 73.8,106.586 73.8,120.75 81.192,128.142 81.192,129.307 J?.3@81.46,129.575
  Top Layer w1: J?.3@81.46,129.575 R16.1
sda: J5.3 J?.4@78.92,129.575 R17.1 U2.20 | length 51.4
  Top Layer w0.6: U2.20 64.6,90.325 65.68,91.405 J5.3 65.624,94.381 65.624,96.874 74.875,106.125 74.875,120.25 v1(79.05,124.425)
  Top Layer w1: J?.4@78.92,129.575 R17.1
  Bottom Layer w0.6: J?.4@78.92,129.575 78.92,124.609 79.05,124.479 v1(79.05,124.425)
sqw: J5.5 R15.1 U2.22 | length 10.8
  Top Layer w0.6: R15.1 60.79,91.835 62.06,90.565 U2.22
VCC: D1.2 D3.2 D4.2 SW3.3 | length 29.4
  Top Layer w0.6: D4.2@83.075,115.8 83.075,110.175 83.075,103.5 86.825,99.75 D3.2 86.825,93.725 89.775,90.775 SW3.3
pads on no net: J?.4@92.7,125.6 J?.4@92.725,112.1 J?.MH1 J?.MH2 J?.Shell SW3.1 SW3.4 SW3.5 SW3.6 U2.4 U2.5 U2.6 U2.7 U2.8 U2.9 U2.10 U2.11 U2.16 U2.17 U2.18 U2.19 U2.24 U2.32 U2.35 U2.GND U3.9 U3.10 U3.11 U3.12 U3.15

## Keep-outs
Keep-Out Layer:
  the board outline again, w0.254

## Other copper
Top Layer:
  rectangle net +3.3: 41.2,110.65 47.625,119.95
  rectangle net GND: 41.275,120.925 47.7,130.325

## Text inside footprints (layer, text, board x,y; h text height)
J?: Assembly Notes "PCB Edge" at 98.925,110.15 h0.41 r90
J?: Assembly Notes "PCB Edge" at 98.9,123.65 h0.41 r90